# Altium PCB bh_carrier_0_beta_backup.PcbDoc (part 2 of 2)
Units mil, origin at the board's own origin, x right, y up, seen from the top; angles counter-clockwise.
Board outline 3937.01 x 2362.2 mil, 2 copper layers (Top Layer, Bottom Layer); 128 components, 129 nets, 524 pads, 190 vias.
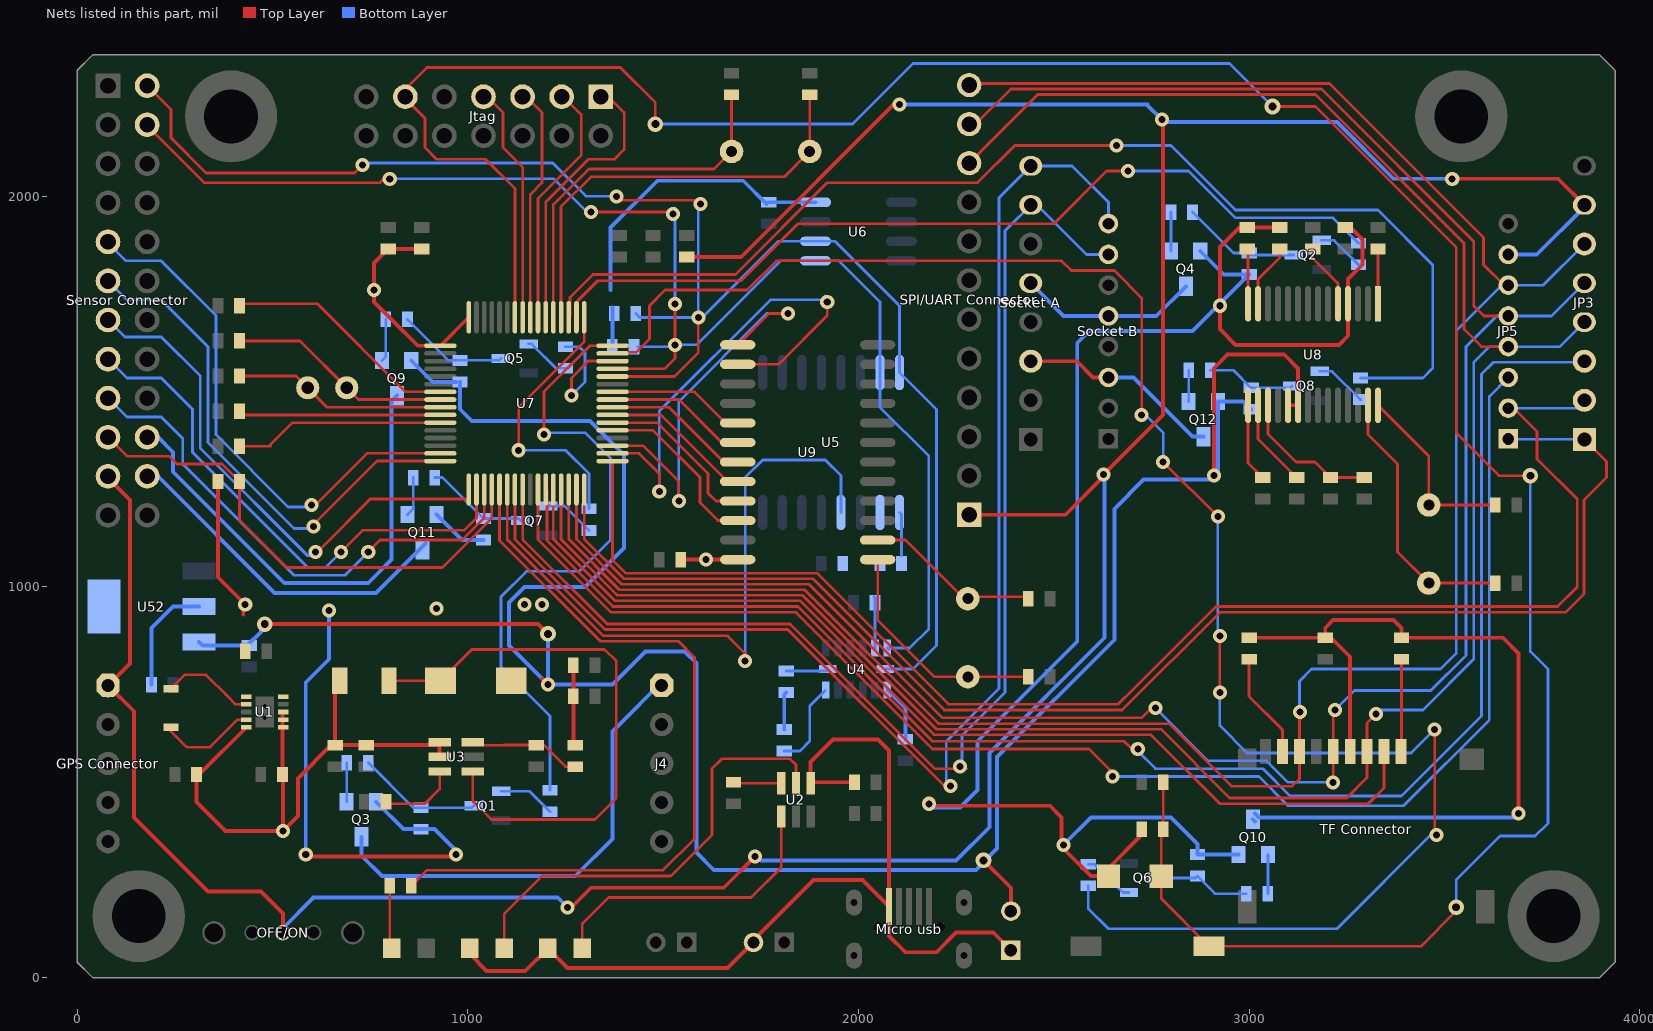
[diagram p2: the nets of this part, all layers, seen from the top]

## Via types
v1: diameter 36, hole 18, Top Layer to Bottom Layer, 174 vias
v2: diameter 40, hole 20, Top Layer to Bottom Layer, 14 vias
v3: diameter 39.37, hole 39.37, Top Layer to Bottom Layer, 2 vias

## Nets (pads, with @x,y where several pads share a name; then routed paths per layer and width w, separated by ;. In a path a pad name is that pad's centre, name@x,y a point inside that pad or via, vN(x,y) a via of type N, cw(c..) or ccw(c..) an arc to the next point about the centre after c; other vN are vias at no path point) (continued)
IO4: "Sensor Connector.9" U7.15 | length 1382.7
  Top Layer w7: v1(600,1210) 605,1205 742.05,1342.05 U7.15@929.53,1342.05
  Bottom Layer w7: 78.74,1883.46 78.74,1881.26 125,1835 215,1835 355,1695 355,1390 540,1205 605,1205 v1(600,1210)
IO5: "Sensor Connector.11" U7.16 | length 1343.9
  Top Layer w7: v1(605,1155) 605,1150 605,1160 767.36,1322.36 U7.16@929.53,1322.36
  Bottom Layer w7: 78.74,1783.46 127.2,1735 215,1735 335,1615 335,1370 555,1150 605,1150 v1(605,1155)
IO6: "Sensor Connector.13" U7.17 | length 1372.4
  Top Layer w7: v1(610,1090) 610,1100 625,1100 750,1225 1002.36,1225 U7.17@1002.36,1249.53
  Bottom Layer w7: 78.74,1683.46 122.2,1640 215,1640 315,1540 315,1355 590,1080 600,1080 v1(610,1090)
IO7: "Sensor Connector.15" U7.18 | length 1353.8
  Top Layer w7: v1(675,1090) 730,1145 990,1145 1022.05,1177.05 U7.18@1022.05,1249.53
  Bottom Layer w7: 78.74,1583.46 127.2,1535 215,1535 295,1455 295,1345 590,1050 635,1050 v1(675,1090)
IO8: "Sensor Connector.17" U7.19 | length 1322.5
  Top Layer w7: v1(745,1090) 775,1120 985,1120 1041.73,1176.73 U7.19@1041.73,1249.53
  Bottom Layer w7: 78.74,1483.46 127.2,1435 215,1435 270,1380 270,1315 555,1030 685,1030 v1(745,1090)
IO_0: "Socket A.7" "Socket B.7" U7.24 | length 3293.6
  Top Layer w7: U7.24@1140.16,1249.53 1140.16,1121.65 1356.81,905 1825,905 2195,535 v1@2275,535
  Bottom Layer w7: v1(2260,540) v1@2270,540 ; v1@2275,535 2265,545 2265,620 2375,730 2375,1912.01 2449,1986 2583.61,1851.39 2639.8,1851.39
IO_1: "Socket A.8" "Socket B.8" U7.23 | length 3513.4
  Top Layer w7: U7.23@1120.47,1249.53 1120.47,1121.54 1351.01,891 1819,891 2220,490 v1@2239.53,490 ; 2440.95,2066.29 2440.95,2077.95 2452.61,2077.95
  Bottom Layer w7: v1@2240,485 2225,500 2225,605 2360,740 2360,1907.21 2359.55,1907.66 2359.55,1996.56 2440.95,2077.95 2547.05,2077.95 2640,1985 2640,1930.13
  other v1: 2235,490
LED1: R25.2 U7.21 | length 1992.9
  Top Layer w7: R25.2@855.12,235 895.12,275 1500,275 1580,355 1580,820 1539,861 1339,861 1081.1,1118.9 U7.21@1081.1,1249.53
NetC11_2: C11.2 U7.52 XT1.1 | length 1133
  Top Layer w7: U7.52@1238.58,1690.47 1238.58,1973.58 1315,2050 1810,2050 XT1.1@1875,2115 ; XT1.1@1875,2105.12 XT1.1@1875,2115 ; C11.2@1875,2260 C11.2@1875,2259.88 XT1.1@1875,2115
NetC13_2: C13.2 U7.53 XT1.2 | length 955.8
  Top Layer w7: U7.53@1218.9,1690.47 1218.9,1978.9 1310,2070 1630,2070 XT1.2@1675,2115 C13.2@1675,2259.88 C13.2@1675,2269.88
NetC15_1: 
NetC19_2: C19.2 U7.8 XT2.2 | length 580.7
  Top Layer w7: C19.2@415.12,1640 425.12,1630 570,1630 XT2.2@690,1510 720.16,1479.84 U7.8@929.53,1479.84
NetC21_2: C21.2 U7.9 XT2.1 | length 565.8
  Top Layer w7: C21.2@415.12,1540 C21.2@425.12,1550 ; C21.2@415.12,1550 425.11,1540 560,1540 XT2.1@590,1510 639.84,1460.16 U7.9@929.53,1460.16
NetC22_1: C22.1 U8.28 XT4.2 | length 479
  Top Layer w7: U8.28@3330,1465.16 3460,1335.16 XT4.2@3460,1210 C22.1@3630,1210
NetC23_1: C23.1 U9.1 XT3.2 | length 600.3
  Top Layer w7: U9.1@2049.13,1070 2049.13,915.87 2195,770 XT3.2@2280,770 C23.1@2434.88,770
NetC26_2: C26.2 U9.2 XT3.1 | length 450
  Top Layer w7: U9.2@2049.13,1120 2120,1120 2270,970 XT3.1@2280,970 2285,975 C26.2@2434.88,975
NetC28_1: C28.1 U8.27 XT4.1 | length 689.6
  Top Layer w7: U8.27@3304.41,1465.16 3304.41,1390.59 3380,1315 3380,1090 XT4.1@3460,1010 C28.1@3630,1010
NetC30_2: C30.2 R35.2 U8.17 | length 366.3
  Top Layer w7: U8.17@3048.5,1465.16 3048.5,1391.5 3120,1320 3168.44,1320 R35.2@3208.33,1280.12 C30.2@3295,1280.12
NetD1_K: D1.K U2.1 | length 770.7
  Top Layer w7: D1.K@1293,75 1293,138 1360,205 1725,205 1802.6,282.6 U2.1@1802.6,412.68 U2.1@1802.6,404.6
NetD2_K: D2.K U2.5 | length 1152.9
  Top Layer w7: D2.K@1093,75 1093,163 1190,260 1520,260 1625,365 1625,535 1650,560 1825,560 1840,545 U2.5@1840,497.32
NetD3_1: D3.1 L2.2 U3.1 | length 1462.7
  Top Layer w7: L2.2@797.99,760 D3.1@930,760 1010,840 1350,840 1380,810 1380,460 1325,405 1060,405 1012.32,452.68 U3.1@1012.32,527.6
NetD4_A: D4.A R25.1 | length 162.1
  Top Layer w7: R25.1@800,235 800,80 D4.A@805,75
NetL1_1: L1.1 U1.2 | length 246.9
  Top Layer w7: L1.1@240.08,739.42 240.08,740.08 275,775 330,775 385.67,719.33 ; 380,725 385.67,719.33 ; U1.2@432.68,699.68 405.32,699.68 385.67,719.33
NetL1_2: L1.2 U1.4 | length 249
  Top Layer w7: L1.2@239.92,640.58 239.92,630.08 280,590 340,590 410.32,660.32 U1.4@432.68,660.32
NetQ1_1: Q1.1 R5.2 | length 146.3
  Bottom Layer w7: Q1.1@1085.67,477.17 1157.72,477.17 R5.2@1210.24,424.65
NetQ1_3: Q1.3 R1.2 R3.2 | length 334.2
  Bottom Layer w7: R1.2@745.12,550 860,435.12 R3.2@880,435.12 ; R3.2@865,435.12 R3.2@880,435.12 ; Q1.3@1014.8,439.76 1010.16,435.12 900,435.12 885,435.12 R3.2@880,435.12
NetQ2_1: Q2.1 R6.2 | length 120.5
  Bottom Layer w7: Q2.1@3185.43,1887.4 3217.48,1887.4 R6.2@3280,1824.88
NetQ2_3: Q2.3 R2.2 R4.2 | length 304.7
  Bottom Layer w7: R2.2@2855.35,1959.76 2960,1855.12 R4.2@3000,1855.12 3005.12,1850 Q2.3@3114.57,1850
NetQ3_1: Q3.1 R1.1 | length 99.9
  Bottom Layer w7: Q3.1@689.76,450.24 690,450.47 R1.1@690,550
NetQ4_1: Q4.1 R2.1 | length 99.9
  Bottom Layer w7: Q4.1@2800,1860 2800,1959.53 R2.1@2800.24,1959.76
NetQ5_1: Q5.1 R19.2 | length 120.5
  Bottom Layer w7: Q5.1@1155.43,1622.4 1162.6,1622.4 1225.12,1559.88 R19.2@1250,1559.88
NetQ5_3: Q5.3 R10.2 R15.2 | length 284.9
  Bottom Layer w7: R10.2@845.12,1685 950,1580.12 R15.2@980,1580.12 1079.69,1580.12 Q5.3@1084.57,1585
NetQ6_1: Q6.1 R20.2 | length 134.6
  Bottom Layer w7: R20.2@2588,290.12 2604.88,290.12 2677.4,217.6 Q6.1@2692.57,217.6
NetQ6_3: Q6.3 R11.2 R16.2 | length 250.1
  Bottom Layer w7: Q6.3@2763.43,255 2863.12,255 R16.2@2868,259.88 2912.88,215 R11.2@2992.88,215
NetQ7_1: Q7.1 R21.2 | length 130.5
  Bottom Layer w7: Q7.1@1205.43,1207.4 1247.48,1207.4 R21.2@1310,1144.88
NetQ7_3: Q7.3 R12.2 R17.2 | length 272.3
  Bottom Layer w7: R12.2@915.12,1280 935.12,1280 R17.2@1040,1175.12 1129.45,1175.12 Q7.3@1134.57,1170 ; Q7.3@1139.45,1175.12 Q7.3@1144.57,1170
NetQ8_1: Q8.1 R22.2 | length 134.6
  Bottom Layer w7: Q8.1@3180.67,1552.17 3212.72,1552.17 R22.2@3285.24,1479.65
NetQ8_3: Q8.3 R13.2 R18.2 | length 230.1
  Bottom Layer w7: R13.2@2900.35,1554.76 2960.35,1554.76 R18.2@3005.24,1509.88 3104.92,1509.88 Q8.3@3109.8,1514.76
NetQ9_1: Q9.1 R10.1 | length 109.1
  Bottom Layer w7: Q9.1@780,1580 790,1590 R10.1@790,1685
NetQ10_1: Q10.1 R11.1 | length 99.9
  Bottom Layer w7: R11.1@3048,215 3048.24,215.24 Q10.1@3048.24,314.76
NetQ11_1: Q11.1 R12.1 | length 100.9
  Bottom Layer w7: Q11.1@845.2,1185.24 860,1200.04 R12.1@860,1280
NetQ12_1: Q12.1 R13.1 | length 79.9
  Bottom Layer w7: Q12.1@2845,1475 2845.24,1475.24 R13.1@2845.24,1554.76
NetR7_2: R7.2 U2.6 | length 123.8
  Top Layer w7: R7.2@1680,500.12 1682.8,497.32 U2.6@1802.6,497.32
NetR14_1: R14.1 R24.2 U3.3 | length 288.8
  Top Layer w7: U3.3@1012.32,602.4 1019.61,595.12 1091.98,595.12 1092.37,595.5 1174.62,595.5 R24.2@1175,595.12 1194.88,595.12 1250,540 R14.1@1275,540
NetR23_2: R23.2 U3.6 | length 198.1
  Top Layer w7: R23.2@790.12,445 890,445 927.68,482.68 U3.6@927.68,527.6
NetR27_2: R27.2 U4.6 | length 221.7
  Bottom Layer w7: R27.2@1810,579.88 1849.88,579.88 1875,605 1875,694.77 U4.6@1915,734.77
NetR28_1: R28.1 U5.1 | length 112.9
  Bottom Layer w7: U5.1@2105,1190.87 2110,1185.87 2110,1080
NetR29_1: R29.1 U4.12 | length 132
  Bottom Layer w7: R29.1@2040,975 2042.24,972.76 U4.12@2042.24,843.97
NetR30_2: R30.2 U4.7 | length 108.4
  Bottom Layer w7: R30.2@1815,785.12 1916.46,785.12 U4.7@1921.34,790
NetR33_1: R33.1 U8.1 | length 140
  Top Layer w7: U8.1@3330,1725 R33.1@3330,1865
NetR34_1: R34.1 U8.5 | length 167
  Top Layer w7: R34.1@3162.5,1865 3162.5,1842.5 3227.64,1777.36 U8.5@3227.64,1725
NetR37_1: R37.1 U8.13 | length 163.1
  Top Layer w7: U8.13@3022.91,1725 3022.91,1787.91 3078.75,1843.75 R37.1@3078.75,1865
NetR38_2: R38.2 U8.16 | length 225.9
  Top Layer w7: U8.16@3022.91,1465.16 3022.91,1378.87 R38.2@3121.66,1280.12
NetR39_1: R39.1 U8.14 | length 141
  Top Layer w7: R39.1@2995,1865 2997.32,1862.68 U8.14@2997.32,1725
NetR40_2: R40.2 U8.15 | length 200.6
  Top Layer w7: U8.15@2997.32,1465.16 2997.32,1317.8 R40.2@3035,1280.12
NetR41_2: "TF Connector.1" R41.2 | length 236.6
  Top Layer w7: 3388.58,578.82 3390,580.24 R41.2@3390,814.88
NetR42_2: "TF Connector.8" R42.2 | length 271.5
  Top Layer w7: R42.2@3000,814.88 3000,720 3085.43,634.57 3085.43,578.82
ONE_WIRE: "Sensor Connector.19" R36.2 U7.20 | length 1304.9
  Top Layer w7: 78.74,1383.46 127.2,1335 235,1335 255,1315 370.12,1315 R36.2@415.12,1270 415.12,1169.88 535,1050 935,1050 1061.42,1176.42 U7.20@1061.42,1249.53
POWER_C0: R19.1 U7.46 | length 349.1
  Top Layer w7: v1(1265,1490) 1265,1535 1308.27,1578.27 U7.46@1370.47,1578.27
  Bottom Layer w7: R19.1@1250,1615 1285,1615 1300,1600 1300,1525 v1(1265,1490)
POWER_C1: R20.1 U7.47 | length 4686
  Top Layer w7: U7.47@1370.47,1597.95 1373.75,1601.23 1431.23,1601.23 1465,1635 1465,1720 1505,1760 1715,1760 1790,1835 2520,1835 2545,1810 2655,1810 2725,1740 v1(2725,1440) v1@2710,1440 ; v1(2780,1320) v1(2920,1180) ; v1(2925,730) v1(2925,875) ; v1(3475,635) 3475,370 v1(3480,365)
  Bottom Layer w7: R20.1@2588,235 2588,177 2640,125 3225,125 v1@3472.5,372.5 ; v1(2725,1440) 2735,1440 2780,1395 v1(2780,1320) ; v1(2920,1180) 2920,875 v1(2925,875) ; v1(2925,730) 2925,645 2995,575 3415,575 v1(3475,635)
POWER_C2: R5.1 U7.48 | length 1668.1
  Top Layer w7: v1(1195,1390) 1195,1500 1312.64,1617.64 U7.48@1370.47,1617.64
  Bottom Layer w7: v1@1195,1395 1300,1395 1365,1330 1365,1120 1285,1040 1150,1040 1085,975 1085,795 1210.24,669.76 1210.24,530 ; R5.1@1210.24,479.76 1210.24,530 ; 1210.24,569.76 1210.24,530
POWER_C3: R21.1 U7.49 | length 709.8
  Top Layer w7: v1(1130,1350) 1130,1460 1297.64,1627.64 U7.49@1297.64,1690.47
  Bottom Layer w7: v1(1130,1350) 1205,1350 ; 1200,1350 1205,1350 ; R21.1@1310,1200 1310,1290 1250,1350 1205,1350
POWER_C4: R6.1 U7.50 | length 2256.6
  Top Layer w7: U7.50@1277.95,1690.47 1281.23,1693.75 1281.23,1732.7 1332.53,1784 1699,1784 1844.87,1929.87 1845,1930 2500,1930 2635,2065 v1(2690,2065)
  Bottom Layer w7: v1(2690,2065) 2845,2065 2965,1945 3215,1945 R6.1@3280,1880
POWER_C5: R22.1 U7.51 | length 3008.3
  Top Layer w7: U7.51@1258.27,1690.47 1261.55,1693.75 1261.55,1741.55 1320,1800 1685,1800 1920,2035 2305,2035 2400,2130 v1(2660,2130)
  Bottom Layer w7: v1(2660,2130) 2799.8,2130 2964.8,1965 3330,1965 3470,1825 3470,1560 3444.76,1534.76 R22.1@3285.24,1534.76
RST: C15.1 D5.1 Jtag.11 R26.1 Reset.2 U7.58 | length 6992.5
  Top Layer w7: U7.58@1120.47,1690.47 1120.47,2020.03 1045.5,2095 920,2095 890,2125 890,2200 827.5,2262.5 895,2330 1390,2330 1480,2240 v2(1480,2185) ; C15.1@2780,500 R26.1@2780,380 2775,375 D5.1@2775,260 2775,202.48 Reset.2@2897.48,80 3440,80 3530,170 v2(3530,180) ; v2@3055,2225 v2(3060,2230) 3170,2230 3530,1870 3530,1395 3640,1285 v2(3720,1285)
  Bottom Layer w7: v2(1480,2185) 1985,2185 2140,2340 2950,2340 v2(3060,2230) ; v2(3530,180) 3530,250 3642.25,362.25 3732.25,362.25 3765,395 3765,790 3720,835 v2(3720,1285)
RTC_RST: U5.4 U7.22 | length 1722.4
  Top Layer w7: U7.22@1100.79,1249.53 1100.79,1121.42 1347.21,875 1665,875 1710,830 v1(1710,810)
  Bottom Layer w7: v1(1710,810) 1710,1280 1755,1325 1915,1325 1955,1285 U5.4@1955,1190.87
RXD0: JP3.2 JP5.2 U7.33 | length 3764.1
  Top Layer w7: U7.33@1370.47,1322.36 1370.47,1069.53 1405,1035 1895,1035 2230,700 2665,700 2702.5,737.5 2702.7,737.5 2915.2,950 3790,950 3840,1000 3840,1225 3737.31,1327.69 3737.31,1397.69 3677.31,1457.69 JP5.2@3663.42,1457.69
  Bottom Layer w7: JP5.2@3663.42,1457.69 3725,1457.69 ; 3702.79,1457.69 3725,1457.69 ; JP3.2@3858.27,1477.95 3838.01,1457.69 3725,1457.69
RXD1: U7.35 U9.13 | length 1048
  Top Layer w7: U7.35@1370.47,1361.73 1448.27,1361.73 1540,1270 v1(1540,1220) ; U9.13@1690.87,1620 1770.87,1700 v1(1820,1700)
  Bottom Layer w7: v1(1540,1220) 1540,1475 1765,1700 v1(1820,1700)
SCL: "Sensor Connector.2" R32.1 U4.14 U5.16 U6.6 U7.44 | length 4138.3
  Top Layer w7: 178.74,2283.46 240,2222.2 240,2150 330,2060 710,2060 v1(730,2080) ; U7.44@1370.47,1538.9 1528.9,1538.9 1590,1600 v1(1590,1690) ; v1(1380,2000) 1390,1990 1590,1990 1595,1985 v1(1595,1980)
  Bottom Layer w7: v1@735.5,2085.5 1217.37,2085.5 1302.37,2000.5 1379.5,2000.5 v1(1380,2000) ; R32.1@1430,1700 1440,1690 v1(1590,1690) 1590,1990 1595,1985 v1(1595,1980) ; v1@1595,1685 1795,1885 U6.6@1890,1885 1940,1885 2105,1720 U5.16@2105,1549.13 2200,1454.13 2200,850 2140,790 U4.14@2068.66,790
SCLK: "SPI/UART Connector.11" "TF Connector.5" JP3.5 JP5.5 U7.31 | length 5872.5
  Top Layer w7: U7.31@1277.95,1249.53 1277.95,1122.45 1393.4,1007 1873,1007 2215,665 2725,665 2750,690 v1(2760,690) ; 2283.46,2184.96 2299.96,2184.96 2390,2275 3185,2275 3575,1885 3575,1720 3601.09,1693.91 JP5.5@3663.42,1693.91 ; v1(3215,500) 3215.35,500.35 3215.35,578.82 3215.35,670.35 3225,680 v1(3220,685) ; JP3.5@3837.95,1777.95 JP3.5@3858.27,1777.95
  Bottom Layer w7: v1(2760,690) 2895,555 3045,555 3100,500 v1(3215,500) ; v1(3220,685) 3225,680 3225,690 3270,735 3465,735 3555,825 3555,1615 3633.91,1693.91 3774.23,1693.91 JP3.5@3858.27,1777.95
SD_CS: "TF Connector.2" U7.28 | length 2644.5
  Top Layer w7: U7.28@1218.9,1249.53 1218.9,1122.11 1376.01,965 1850,965 2193,622 2748,622 2925,445 3305,445 3345.28,485.28 3345.28,578.82
SDA: "Sensor Connector.4" R31.1 U4.13 U5.15 U6.5 U7.45 | length 3845.2
  Top Layer w7: 178.74,2183.46 178.74,2181.26 325,2035 775,2035 795,2055 800,2050 v1(800,2045) ; v1(1315,1960) 1315,1970 1325,1960 1530,1960 v1(1525,1955) ; U7.45@1370.47,1558.58 1503.58,1558.58 1530,1585 v1(1530,1620) v1(1530,1724.5)
  Bottom Layer w7: v1@795,2055 805,2045 1220,2045 1305,1960 1315,1970 v1(1315,1960) ; v1(800,2045) v1@800,2050 ; R31.1@1435,1615 1525,1615 v1(1530,1620) 1585,1620 1800,1835 U6.5@1890,1835 1950,1835 2055,1730 U5.15@2055,1549.13 2055,1460 2180,1335 2180,892.95 2131.03,843.97 U4.13@2073.74,843.97 U4.13@2077.71,840 ; v1(1530,1724.5) v1@1530,1970
SIMO: "SPI/UART Connector.10" "TF Connector.3" JP3.4 JP5.4 U7.29 | length 5906.1
  Top Layer w7: U7.29@1238.58,1249.53 1238.58,1122.22 1381.8,979 1856,979 2199,636 2774,636 2950,460 3250,460 3301.97,511.97 3301.97,578.82 ; 2283.46,2084.96 2459,2260.5 3169.5,2260.5 3550,1880 3550,1660 3594.83,1615.17 JP5.4@3663.42,1615.17 ; 3305,581.85 3301.97,578.82 ; v1(3325,675) 3301.97,651.97 3301.97,578.82
  Bottom Layer w7: v1(3325,675) 3335,685 3445,685 3575,815 3575,1575 3615.17,1615.17 3795.49,1615.17 JP3.4@3858.27,1677.95
SOCKET0_CS: JP3.3 U7.27 | length 4035.2
  Top Layer w7: U7.27@1199.21,1249.53 1202.49,1246.25 1202.49,1118.71 1371.21,950 1844.8,950 2189.8,605 2680,605 2700,585 v1(2715,585)
  Bottom Layer w7: v1(2715,585) 2715,580 2760,535 3035,535 3105,465 3390,465 3595,670 3595,1545 3625,1575 3855.32,1575 JP3.3@3858.27,1577.95
SOCKET1_CS: JP5.3 U7.26 | length 3844
  Top Layer w7: U7.26@1179.53,1249.53 1179.53,1121.88 1366.41,935 1840,935 2190,585 2590,585 2650,525 v1(2650,515)
  Bottom Layer w7: v1(2650,515) 3025,515 3100,440 3395,440 3615,660 3615,1145 ; 3615,1150 3615,1145 ; JP5.3@3663.42,1536.43 3615,1488.02 3615,1145
SOMI: "SPI/UART Connector.12" "TF Connector.7" JP3.6 JP5.6 U7.30 | length 5870.6
  Top Layer w7: U7.30@1258.27,1249.53 1258.27,1122.34 1387.6,993 1862,993 2205,650 2795,650 2955,490 3110,490 3128.74,508.74 3128.74,578.82 ; 2283.46,2284.96 2287.5,2289 3206,2289 3600,1895 3600,1825 3652.35,1772.65 JP5.6@3663.42,1772.65 ; 3130,580.08 3128.74,578.82 ; v1(3130,680) 3130,662.52 3128.74,661.26 3128.74,578.82
  Bottom Layer w7: v1(3130,680) 3130,662.52 3128.74,661.26 3128.74,758.74 3160,790 3490,790 3530,830 3530,1655 3647.65,1772.65 3752.97,1772.65 JP3.6@3858.27,1877.95
SRADD0: U7.40 U9.19 | length 378.4
  Top Layer w7: U7.40@1370.47,1460.16 1514.84,1460.16 1655,1320 U9.19@1690.87,1320
SRADD1: U7.41 U9.18 | length 365.9
  Top Layer w7: U7.41@1370.47,1479.84 1540.16,1479.84 1650,1370 U9.18@1690.87,1370
SRADD2: U7.42 U9.17 | length 353.3
  Top Layer w7: U7.42@1370.47,1499.53 1580.47,1499.53 1660,1420 U9.17@1690.87,1420
STADD0: U7.37 U9.22 | length 454.2
  Top Layer w7: U7.37@1370.47,1401.1 1473.9,1401.1 1594,1281 1594,1264.75 1594,1232.25 1594,1216 1640,1170 U9.22@1690.87,1170
STADD1: U7.38 U9.21 | length 432.9
  Top Layer w7: U7.38@1370.47,1420.79 1484.21,1420.79 1615,1290 1615,1240 1635,1220 U9.21@1690.87,1220
STADD2: U7.39 U9.20 | length 391
  Top Layer w7: U7.39@1370.47,1440.47 1494.53,1440.47 1665,1270 U9.20@1690.87,1270
TCK: Jtag.7 U7.57 | length 626
  Top Layer w7: Jtag.7@1040,2275 1040,2265 1090,2215 1090,2125 1140.16,2074.84 U7.57@1140.16,1690.47
TDI: Jtag.3 U7.55 | length 651
  Top Layer w7: U7.55@1179.53,1690.47 1179.53,1994.53 1290,2105 1290,2210 1240,2260 Jtag.3@1240,2275
TDO: Jtag.1 U7.54 | length 731.1
  Top Layer w7: U7.54@1199.21,1690.47 1199.21,1985 1309.21,2095 1375,2095 1400,2120 1400,2215 Jtag.1@1340,2275
TMS: Jtag.5 U7.56 | length 617.7
  Top Layer w7: Jtag.5@1140,2275 1140,2265 1190,2215 1190,2035.16 1159.84,2005 U7.56@1159.84,1690.47
TXD0: JP3.1 JP5.1 U7.32 | length 3630.7
  Top Layer w7: U7.32@1297.64,1249.53 1297.64,1122.56 1399.2,1021 1883.8,1021 2219.8,685 2675,685 2925,935 3810,935 3857.27,982.27 3857.27,1222.27 3915,1280 3915,1321.22 JP3.1@3858.27,1377.95 JP3.1@3857.27,1378.95
  Bottom Layer w7: JP5.1@3663.42,1378.95 3664.42,1377.95 JP3.1@3858.27,1377.95
TXD1: U7.34 U9.14 | length 1251.3
  Top Layer w7: U7.34@1370.47,1342.05 1437.95,1342.05 1490,1290 v1(1490,1245) ; U9.14@1690.87,1570 1795,1570 1920,1695 v1(1920,1730)
  Bottom Layer w7: 1490,1265 1490,1450 1775,1735 1905,1735 1915,1745 1920,1740 v1(1920,1730)
VBUS: "GPS Connector.1" "Sensor Connector.21" "SPI/UART Connector.1" C4.2 C5.2 C9.1 C10.1 JP3.7 JP5.7 L2.1 OFF/ON.2 R8.2 U1.5 U1.6 U1.7 U1.8 U3.4 U3.5 | length 10228.9
  Top Layer w10: 86.54,1283.46 78.74,1283.46 78.74,1278.74 135,1222.48 135,804.29 78.74,748.03 ; 102.47,748.03 78.74,748.03 ; U1.5@432.68,640.63 312.05,520 C5.2@305.12,520 305.12,449.88 380,375 v1(526.26,375) ; OFF/ON.2@526.26,115 526.26,163.74 470,220 335,220 145,410 145,681.77 78.74,748.03 ; U1.8@527.32,680 525.12,677.8 C4.2@525.12,520 526.26,518.86 v1(526.26,375) ; L2.1@672.01,760 660,747.99 C9.1@660,595 ; U3.5@927.68,565 U3.4@927.68,602.4 920.28,595 C10.1@740,595 C9.1@660,595 ; v1@1265,180 1315,230 1655,230 v1(1735,310) ; R8.2@1560,1844.88 1699.88,1844.88 v1@2090,2235 ; 2283.46,1184.96 2529.96,1184.96 v1@2627.47,1282.47 ; v1(2627.47,1287.47) 2780,1440 v1@2780,2196.56 ; v1(3520,2045) 3791.22,2045 JP3.7@3858.27,1977.95 JP3.7@3837.95,1977.95 ; v1(526.26,375) 565,413.74 565,510 650,595 C9.1@660,595
  Bottom Layer w10: 78.74,721.26 78.74,745 ; OFF/ON.2@526.26,115 526.26,126.26 605,205 1230,205 v1(1255,180) ; 1750,300 2250,300 2335,385 2335,575 2630,870 v1@2630,1284.94 ; v1(2105,2235) 2740,2235 2740,2233.13 v1(2776.56,2196.56) 2783.13,2190 3225,2190 3370,2045 v1(3520,2045) ; JP5.7@3663.42,1851.39 3736.39,1851.39 3858.27,1973.27 JP3.7@3858.27,1977.95
VCC_BASE_3.3V: C1.1 C12.1 C14.1 C16.1 C17.1 C18.1 C27.2 C29.1 C142.1 D5.2 Q3.2 Q4.2 Q10.2 Q11.2 R3.1 R4.1 R16.1 R17.1 R26.2 R27.1 R28.2 R30.1 R31.2 R32.2 R36.1 R37.2 R39.2 U1.1 U1.10 U4.1 U5.2 U6.8 U7.1 U7.64 U8.4 U9.24 U52.2 U52.4 | length 8322
  Top Layer w10: R36.1@360,1270 360,1025 425,960 425,930 ; C1.1@430,825 C1.1@430,835 C1.1@432.68,832.32 ; v1@590,310 965,310 v1(970,315) ; 805,1685 810,1680 ; C14.1@805,1855.83 C14.1@795.83,1865 ; C18.1@876.87,1860 C18.1@881.87,1865 C14.1@795.83,1865 ; U7.64@1002.36,1690.47 U7.1@929.53,1617.64 872.36,1617.64 810,1680 ; C27.2@1545.12,1070 v1(1610,1070) U9.24@1690.87,1070 ; v1(2180,445) 2185,440 2490,440 2519.65,410.35 v1@2519.65,340 ; v1@2520,335 2595,260 D5.2@2640,260 2640,280 2724.88,364.88 R26.2@2724.88,380 ; R37.2@3078.75,1920.12 R39.2@2995,1920.12 2975.12,1920.12 2925,1870 v1(2925,1720) 2925,1660 2965,1620 3230,1620 3253.23,1643.23 U8.4@3253.23,1725 3253.23,1788.23 3290,1825 3290,1890 3259.88,1920.12 C29.1@3246.26,1920.12 ; C14.1@795.83,1865 760,1829.17 v1(760,1760) 760,1730 810,1680
  Bottom Layer w10: C142.1@190,750 190,895 245,950 U52.2@312.05,950 ; v1(585,315) 585,755 645,815 v1(645,940) ; Q3.2@764.76,450.24 835,380 R3.1@880,380 915,380 970,325 v1(970,315) ; Q11.2@920.2,1185.24 985.43,1120 R17.1@1040,1120 ; 1365,1760 1365,1920 1485,2040 1705,2040 C16.1@1765,1980 ; R31.2@1369.88,1615 R32.2@1369.88,1715 ; C16.1@1770,1985 U6.8@1890,1985 ; R27.1@1810,635 1810,725 R30.1@1815,730 ; U4.1@2073.74,736.03 2120,689.77 C12.1@2120,610 ; v1(2180,445) 2190,435 2260,435 2305,480 2305,605 2560,860 2560,1625 2590,1655 2855,1655 R4.1@3000,1800 2935,1800 Q4.2@2875,1860 ; v1(2525,340) 2595,410 2800,410 2868,342 R16.1@2868,315 2868.24,314.76 Q10.2@2973.24,314.76
  other v1: 920,945 430,955 1145,955 1190,955
VCC_BASE_5V: C7.1 C8.1 C132.1 D3.2 JP16.2 Q9.2 Q12.2 R14.2 R15.1 R18.1 U8.19 U8.20 U52.3 | length 6905
  Top Layer w10: v2(480,905) 1180,905 v2(1205,880) ; D3.2@1111.1,760 D3.2@1121.1,750 ; 1190,765 v1(1205,750) ; C7.1@1265,800 1270,795 C8.1@1270,720 1270,610.12 ; v2(2320,300) 2390,230 JP16.2@2390,170 ; v1(2910,1285) 2910,1560 2945,1595 3090,1595 3125.27,1559.72 U8.20@3125.27,1465.16 U8.19@3099.69,1465.16
  Bottom Layer w10: U52.3@312.05,859.45 321.5,850 435,850 470,885 470,895 485,895 480,900 v2(480,905) ; Q9.2@855,1580 910,1525 R15.1@970,1525 ; R15.1@980,1525 980,1455 1010,1425 1313,1425 1400,1338 1400,1100 1300,1000 1145,1000 1105,960 1105,850 v1(1205,750) ; v2(1205,880) v1(1205,750) ; v1(2910,1285) 2900,1275 2730,1275 2655,1200 2655,865 2355,565 2355,330 2300.5,275.5 1629.5,275.5 1585,320 1585,805 1555,835 1455,835 1370,750 v1(1205,750) ; v1@2920,1295 Q12.2@2920,1475 2985,1475 R18.1@3005.24,1454.76
VCC_GPS_3.3V: J4.1 Q3.3 | length 1226.3
  Bottom Layer w10: Q3.3@728,360 728,312 780,260 1275,260 1370,355 1370,630 J4.1@1511.73,771.73
VCC_SD_3.3V: "TF Connector.4" C31.2 Q10.3 R41.1 R42.1 | length 2186.5
  Top Layer w10: R42.1@3000,870 C31.2@3194.99,870 3194.99,894.99 3215,915 3370,915 3390,895 R41.1@3390,870 3650,870 3690,830 v1(3690,420) ; C31.2@3210,870 3258.66,821.34 3258.66,578.82
  Bottom Layer w10: Q10.3@3010,405 Q10.3@3015,400 ; Q10.3@3015,420 3025,410 3676,410 3688,422 v1(3690,420)
VCC_SENSOR_3.3V: "Sensor Connector.22" Q11.3 | length 889.1
  Bottom Layer w10: 178.74,1283.46 206.54,1283.46 505,985 765,985 Q11.3@891.72,1111.72
VCC_SENSOR_5V: "Sensor Connector.20" Q9.3 | length 1260.3
  Bottom Layer w10: 178.74,1383.46 206.54,1383.46 245,1345 245,1295 530,1010 745,1010 805,1070 805,1476.53 Q9.3@818.24,1489.76
VCC_SOCKET_3.3V: "Socket A.5" "Socket B.5" Q4.3 | length 463.5
  Bottom Layer w10: 2440.95,1777.95 2524.98,1693.91 2600.43,1693.91 2762.39,1693.91 Q4.3@2838.24,1769.76
VCC_SOCKET_5V: "Socket A.3" "Socket B.3" Q12.3 | length 522.3
  Top Layer w10: 2440.95,1577.95 2558.91,1577.95 2600.43,1536.43 2639.8,1536.43
  Bottom Layer w10: 2639.8,1536.43 2703.57,1536.43 2855.24,1384.76 Q12.3@2883.24,1384.76
VEREF+: C24.1 U7.10 | length 518.4
  Top Layer w7: C24.1@415.12,1449.99 424.64,1440.47 U7.10@929.53,1440.47
VIN: "Micro usb.1" C6.2 D1.A D2.A JP16.1 Solar.2 U2.4 | length 2534.3
  Top Layer w10: D2.A@1005,75 1005,60 1048,17 1147,17 D1.A@1205,75 1255,25 1665,25 Solar.2@1730,90 ; Solar.2@1730,80 Solar.2@1730,90 ; Solar.2@1730.63,90.63 Solar.2@1730,90 ; Solar.2@1731.26,90 1731.26,96.26 1885,250 2010,250 2078.41,181.59 ; C6.2@1989.88,500 1880.08,500 U2.4@1877.4,497.32 1877.4,552.4 1935,610 2050,610 2078.41,581.59 2078.41,106.59 2120,65 2200,65 2250,115 2345,115 JP16.1@2390,70
VREF+: C20.2 U7.7 | length 602.8
  Top Layer w7: C20.2@420.12,1725 615,1725 840.47,1499.53 U7.7@929.53,1499.53
VREF-: C25.1 U7.11 | length 532.5
  Top Layer w7: C25.1@420.12,1360 495,1360 ; 495,1365 550.79,1420.79 U7.11@929.53,1420.79
pads on no net: "Micro usb." "Micro usb.NC" "TF Connector.0" "TF Connector.9" HO1.0 HO2.0 HO3.0 HO4.0 Jtag.2 Jtag.4 Jtag.6 Jtag.8 Jtag.10 Jtag.12 Jtag.13 Jtag.14 OFF/ON.0 OFF/ON.3 U1.V U1.V_2 U4.3 U4.8 U4.9 U4.10 U4.11 U5.3 U5.13 U5.14 U8.2 U8.3 U8.6 U8.8 U8.9 U8.10 U8.11 U8.12 U8.24
copper on no net:
  other v1: 157.48,57.48 3779.53,57.48 88.48,85.48 3710.53,85.48 231.48,94.48 3853.53,94.48 57.48,157.48 257.48,157.48 3679.53,157.48 3879.53,157.48 238.48,220.48 3860.53,220.48 82.48,222.48 3704.53,222.48 157.48,257.48 3779.53,257.48 393.7,2104.72 3543.31,2104.72 324.7,2132.72 3474.31,2132.72 467.7,2141.72 3617.31,2141.72 293.7,2204.72 493.7,2204.72 3443.31,2204.72 3643.31,2204.72 474.7,2267.72 3624.31,2267.72 318.7,2269.72 3468.31,2269.72 393.7,2304.72 3543.31,2304.72
  other v3: 3105.12,165.43 3420.08,165.43

## Polygon pours and split planes (outlines as drawn)
GND on Bottom Layer "Top Layer-No Net" (solid, remove dead copper): 0,2322.83 39.37,2362.2 3897.64,2362.2 3937.01,2322.83 3937.01,39.37 3897.64,0 39.37,0 0,39.37
GND on Top Layer "Top Layer-No Net" (solid, remove dead copper): 0,2322.83 39.37,2362.2 3897.64,2362.2 3937.01,2322.83 3937.01,39.37 3897.64,0 39.37,0 0,39.37

## Keep-outs
Keep-Out Layer:
  the board outline again, w10

## Other copper
Top Layer:
  rectangle net VCC_BASE_3.3V: 415,715 437.68,965
  rectangle net VCC_BASE_5V: 1146.1,685 1270,815
  rectangle net VBUS: 510,105 545,395
  rectangle net VCC_BASE_3.3V: 415,935 1205,970
  rectangle net VCC_BASE_3.3V: 425,765 535,775
  rectangle net VCC_BASE_3.3V: 525,720 535,765
  rectangle net NetD3_1: 800,735 900,785
Bottom Layer:
  rectangle net VCC_BASE_3.3V: 740,1740 1340,1765
  rectangle net VCC_BASE_3.3V: 1335,1610 1375,1765
  rectangle net VCC_BASE_3.3V: 1145,935 1655,970
  rectangle net VCC_BASE_3.3V: 1615,440 1655,950
  rectangle net VCC_BASE_3.3V: 1615,425 2200,460
  rectangle net VCC_BASE_3.3V: 2170,450 2190,620
  rectangle net VCC_BASE_3.3V: 1605,935 1625,1375
  rectangle net VCC_BASE_3.3V: 1415,940 1435,1540
  rectangle net VCC_BASE_3.3V: 1370,1525 1415,1540
  rectangle net VCC_BASE_3.3V: 1360,1525 1375,1620
  rectangle net VCC_BASE_3.3V: 915,935 930,1200
  rectangle net VCC_BASE_3.3V: 325,925 440,975
  rectangle net VCC_BASE_5V: 345,845 435,860
  rectangle net VCC_BASE_5V: 440,855 495,915
  rectangle net VCC_BASE_3.3V: 60,935 315,975
  rectangle net VCC_BASE_3.3V: 2120,600 2180,620
  rectangle net VCC_BASE_3.3V: 1950,1055 2054.88,1070
  rectangle net VCC_BASE_3.3V: 2045,1060 2065,1175
  rectangle net VCC_BASE_3.3V: 1615,1355 2065,1375
  rectangle net VCC_BASE_3.3V: 2045,1205 2065,1375
  rectangle net VCC_BASE_3.3V: 1640,715 1820,730

## Silkscreen, mask and mechanical layers (free items; w line width, h text height)
Top Overlay:
  text "bh_carrier_beta" at 1245,910 h60

## Text inside footprints (layer, text, board x,y; h text height)
U4: Mechanical 1 "*" at 2104.49,689.02 h30 r270; Mechanical 1 "205" at 1995,790 h30 r270; Bottom Overlay "*" at 2104.49,689.02 h30 r270